# Altium PCB Tassel43_RGB.pcbdoc (part 1 of 2)
Units mil, origin at the board's own origin, x right, y up, seen from the top; angles counter-clockwise.
Board outline 9500.18 x 3500.07 mil, 2 copper layers (Top Layer, Bottom Layer); 91 components, 110 nets, 375 pads, 197 vias.
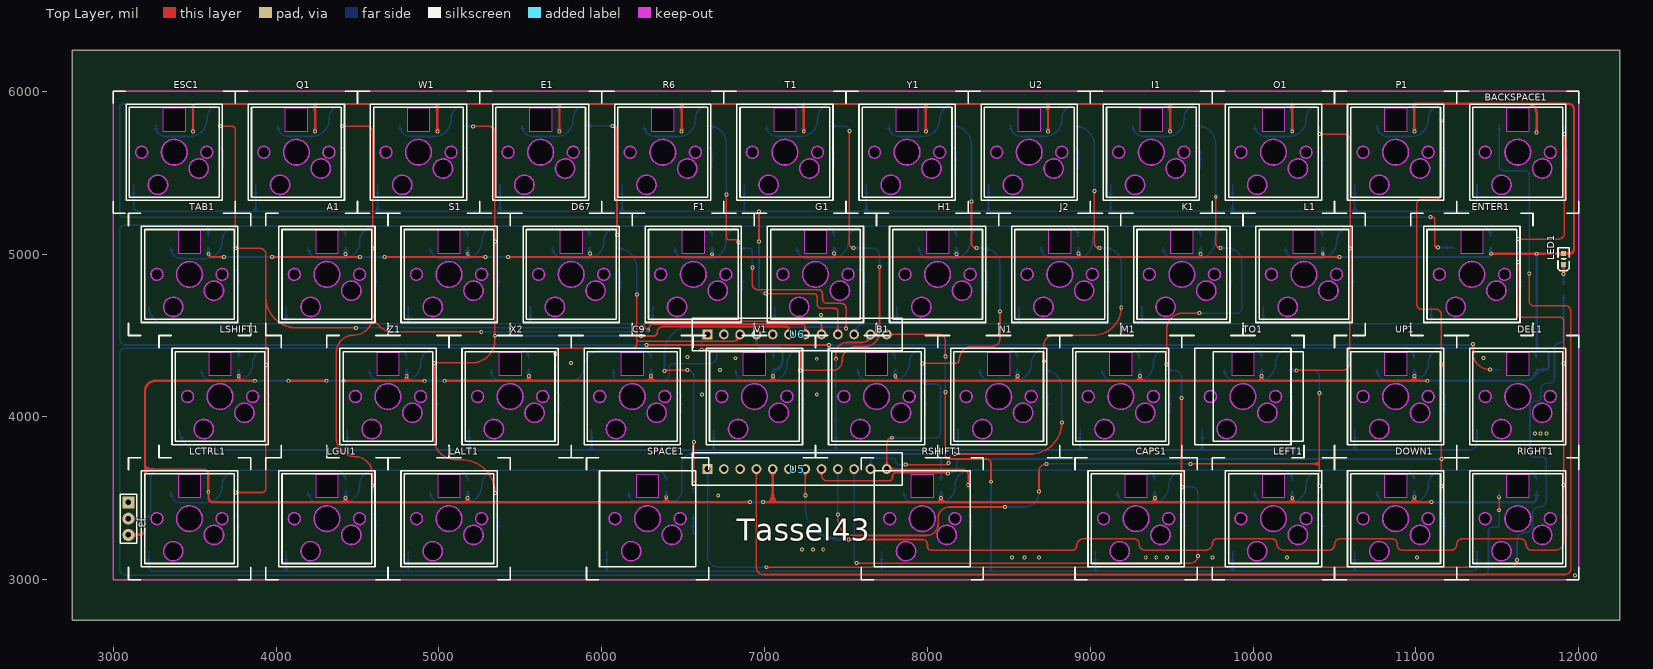
[diagram p0: Top Layer view]
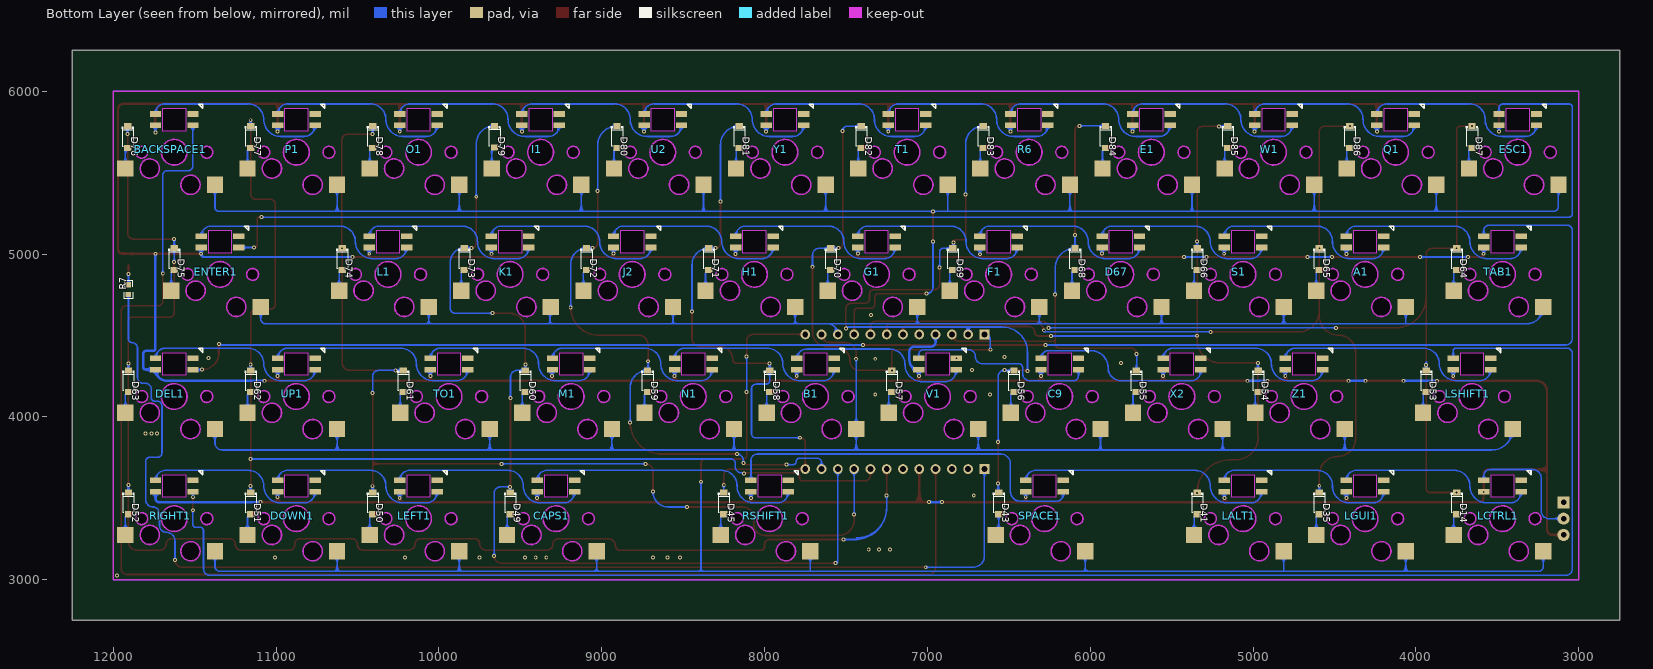
[diagram p1: Bottom Layer view, seen from below]

## Layer stack, top to bottom
Top Layer: signal copper (thickness not stored)
Dielectric: dielectric 12.6, FR-4, Dk 4.8
Bottom Layer: signal copper (thickness not stored)

## Board outline
12250.18,2750 2750,2750 2750,6250.07 12250.18,6250.07

## Components (designator, comment, footprint, x,y, rotation, side; value= is the part's Value field where it differs from the comment)
A1 "凯华轴座+3528反贴灯" 凯华轴座+3528反贴灯 4312.52,4875.05 r0 top
B1 "凯华轴座+3528反贴灯" 凯华轴座+3528反贴灯 7687.59,4125.04 r0 top
BACKSPACE1 "凯华轴座+3528反贴灯" 凯华轴座+3528反贴灯 11625.18,5625.07 r0 top
C9 "凯华轴座+3528反贴灯" 凯华轴座+3528反贴灯 6187.56,4125.04 r0 top
CAPS1 "凯华轴座+3528反贴灯" 凯华轴座+3528反贴灯 9281.38,3375.02 r0 top
D14 "1N4148W" SOD-123_L2.8-W1.8-LS3.7-RD 3750.01,3468.77 r270 bottom
D35 "1N4148W" SOD-123_L2.8-W1.8-LS3.7-RD 4593.78,3468.77 r270 bottom
D41 "1N4148W" SOD-123_L2.8-W1.8-LS3.7-RD 5343.79,3468.77 r270 bottom
D43 "1N4148W" SOD-123_L2.8-W1.8-LS3.7-RD 6562.57,3468.77 r270 bottom
D45 "1N4148W" SOD-123_L2.8-W1.8-LS3.7-RD 8250.1,3468.77 r270 bottom
D49 "1N4148W" SOD-123_L2.8-W1.8-LS3.7-RD 9562.63,3468.77 r270 bottom
D50 "1N4148W" SOD-123_L2.8-W1.8-LS3.7-RD 10406.4,3468.77 r270 bottom
D51 "1N4148W" SOD-123_L2.8-W1.8-LS3.7-RD 11156.42,3468.77 r270 bottom
D52 "1N4148W" SOD-123_L2.8-W1.8-LS3.7-RD 11906.43,3468.77 r270 bottom
D53 "1N4148W" SOD-123_L2.8-W1.8-LS3.7-RD 3937.51,4218.79 r270 bottom
D54 "1N4148W" SOD-123_L2.8-W1.8-LS3.7-RD 4968.78,4218.79 r270 bottom
D55 "1N4148W" SOD-123_L2.8-W1.8-LS3.7-RD 5718.8,4218.79 r270 bottom
D56 "1N4148W" SOD-123_L2.8-W1.8-LS3.7-RD 6468.82,4218.79 r270 bottom
D57 "1N4148W" SOD-123_L2.8-W1.8-LS3.7-RD 7218.83,4218.79 r270 bottom
D58 "1N4148W" SOD-123_L2.8-W1.8-LS3.7-RD 7968.85,4218.79 r270 bottom
D59 "1N4148W" SOD-123_L2.8-W1.8-LS3.7-RD 8718.86,4218.79 r270 bottom
D60 "1N4148W" SOD-123_L2.8-W1.8-LS3.7-RD 9468.88,4218.79 r270 bottom
D61 "1N4148W" SOD-123_L2.8-W1.8-LS3.7-RD 10218.9,4218.79 r270 bottom
D62 "1N4148W" SOD-123_L2.8-W1.8-LS3.7-RD 11156.42,4218.79 r270 bottom
D63 "1N4148W" SOD-123_L2.8-W1.8-LS3.7-RD 11906.43,4218.79 r270 bottom
D64 "1N4148W" SOD-123_L2.8-W1.8-LS3.7-RD 3750.01,4968.81 r270 bottom
D65 "1N4148W" SOD-123_L2.8-W1.8-LS3.7-RD 4593.78,4968.81 r270 bottom
D66 "1N4148W" SOD-123_L2.8-W1.8-LS3.7-RD 5343.79,4968.81 r270 bottom
D67 "凯华轴座+3528反贴灯" 凯华轴座+3528反贴灯 5812.55,4875.05 r0 top
D68 "1N4148W" SOD-123_L2.8-W1.8-LS3.7-RD 6093.81,4968.81 r270 bottom
D69 "1N4148W" SOD-123_L2.8-W1.8-LS3.7-RD 6843.82,4968.81 r270 bottom
D70 "1N4148W" SOD-123_L2.8-W1.8-LS3.7-RD 7593.84,4968.81 r270 bottom
D71 "1N4148W" SOD-123_L2.8-W1.8-LS3.7-RD 8343.86,4968.81 r270 bottom
D72 "1N4148W" SOD-123_L2.8-W1.8-LS3.7-RD 9093.87,4968.81 r270 bottom
D73 "1N4148W" SOD-123_L2.8-W1.8-LS3.7-RD 9843.89,4968.81 r270 bottom
D74 "1N4148W" SOD-123_L2.8-W1.8-LS3.7-RD 10593.9,4968.81 r270 bottom
D75 "1N4148W" SOD-123_L2.8-W1.8-LS3.7-RD 11625.18,4968.81 r270 bottom
D76 "1N4148W" SOD-123_L2.8-W1.8-LS3.7-RD 11911.72,5718.05 r270 bottom
D77 "1N4148W" SOD-123_L2.8-W1.8-LS3.7-RD 11156.42,5718.82 r270 bottom
D78 "1N4148W" SOD-123_L2.8-W1.8-LS3.7-RD 10406.4,5718.82 r270 bottom
D79 "1N4148W" SOD-123_L2.8-W1.8-LS3.7-RD 9658.86,5720.56 r270 bottom
D80 "1N4148W" SOD-123_L2.8-W1.8-LS3.7-RD 8906.37,5718.82 r270 bottom
D81 "1N4148W" SOD-123_L2.8-W1.8-LS3.7-RD 8156.35,5718.82 r270 bottom
D82 "1N4148W" SOD-123_L2.8-W1.8-LS3.7-RD 7406.34,5718.82 r270 bottom
D83 "1N4148W" SOD-123_L2.8-W1.8-LS3.7-RD 6656.32,5718.82 r270 bottom
D84 "1N4148W" SOD-123_L2.8-W1.8-LS3.7-RD 5906.3,5718.82 r270 bottom
D85 "1N4148W" SOD-123_L2.8-W1.8-LS3.7-RD 5156.29,5718.82 r270 bottom
D86 "1N4148W" SOD-123_L2.8-W1.8-LS3.7-RD 4406.27,5718.82 r270 bottom
D87 "1N4148W" SOD-123_L2.8-W1.8-LS3.7-RD 3656.26,5718.82 r270 bottom
DEL1 "凯华轴座+3528反贴灯" 凯华轴座+3528反贴灯 11625.18,4125.04 r0 top
DOWN1 "凯华轴座+3528反贴灯" 凯华轴座+3528反贴灯 10875.16,3375.02 r0 top
E1 "凯华轴座+3528反贴灯" 凯华轴座+3528反贴灯 5625.05,5625.07 r0 top
ENTER1 "凯华轴座+3528反贴灯" 凯华轴座+3528反贴灯 11343.92,4875.05 r0 top
ESC1 "凯华轴座+3528反贴灯" 凯华轴座+3528反贴灯 3375,5625.07 r0 top
F1 "凯华轴座+3528反贴灯" 凯华轴座+3528反贴灯 6562.57,4875.05 r0 top
G1 "凯华轴座+3528反贴灯" 凯华轴座+3528反贴灯 7312.58,4875.05 r0 top
H1 "凯华轴座+3528反贴灯" 凯华轴座+3528反贴灯 8062.6,4875.05 r0 top
I1 "凯华轴座+3528反贴灯" 凯华轴座+3528反贴灯 9375.13,5625.07 r0 top
J2 "凯华轴座+3528反贴灯" 凯华轴座+3528反贴灯 8812.62,4875.05 r0 top
J3 "排针3P" 排针3P 3093.74,3375.02 r270 top
K1 "凯华轴座+3528反贴灯" 凯华轴座+3528反贴灯 9562.63,4875.05 r0 top
L1 "凯华轴座+3528反贴灯" 凯华轴座+3528反贴灯 10312.65,4875.05 r0 top
LALT1 "凯华轴座+3528反贴灯" 凯华轴座+3528反贴灯 5062.54,3375.02 r0 top
LCTRL1 "凯华轴座+3528反贴灯" 凯华轴座+3528反贴灯 3468.75,3375.02 r0 top
LED1 "TJ-S1608SW6TGLC2R-A5" LED0603-R-RD_RED 11906.43,4968.81 r90 top
LEFT1 "凯华轴座+3528反贴灯" 凯华轴座+3528反贴灯 10125.14,3375.02 r0 top
LGUI1 "凯华轴座+3528反贴灯" 凯华轴座+3528反贴灯 4312.52,3375.02 r0 top
LSHIFT1 "凯华轴座+3528反贴灯" 凯华轴座+3528反贴灯 3656.26,4125.04 r0 top
M1 "凯华轴座+3528反贴灯" 凯华轴座+3528反贴灯 9187.62,4125.04 r0 top
N1 "凯华轴座+3528反贴灯" 凯华轴座+3528反贴灯 8437.61,4125.04 r0 top
O1 "凯华轴座+3528反贴灯" 凯华轴座+3528反贴灯 10125.14,5625.07 r0 top
P1 "凯华轴座+3528反贴灯" 凯华轴座+3528反贴灯 10875.16,5625.07 r0 top
Q1 "凯华轴座+3528反贴灯" 凯华轴座+3528反贴灯 4125.02,5625.07 r0 top
R6 "凯华轴座+3528反贴灯" 凯华轴座+3528反贴灯 6375.06,5625.07 r0 top
R7 "1kΩ" R0603 11906.43,4781.3 r90 bottom
RIGHT1 "凯华轴座+3528反贴灯" 凯华轴座+3528反贴灯 11625.18,3375.02 r0 top
RSHIFT1 "凯华轴座+3528反贴灯" 凯华轴座+3528反贴灯 7968.85,3375.02 r0 top
S1 "凯华轴座+3528反贴灯" 凯华轴座+3528反贴灯 5062.54,4875.05 r0 top
SPACE1 "凯华轴座+3528反贴灯" 凯华轴座+3528反贴灯 6281.31,3375.02 r0 top
T1 "凯华轴座+3528反贴灯" 凯华轴座+3528反贴灯 7125.08,5625.07 r0 top
TAB1 "凯华轴座+3528反贴灯" 凯华轴座+3528反贴灯 3468.75,4875.05 r0 top
TO1 "凯华轴座+3528反贴灯" 凯华轴座+3528反贴灯 9937.64,4125.04 r0 top
U2 "凯华轴座+3528反贴灯" 凯华轴座+3528反贴灯 8625.11,5625.07 r0 top
U5 "1X12排针" 1X12排针 6750.07,3579.53 r90 top
U6 "1X12排针" 1X12排针 6750.07,4406.3 r90 top
UP1 "凯华轴座+3528反贴灯" 凯华轴座+3528反贴灯 10875.16,4125.04 r0 top
V1 "凯华轴座+3528反贴灯" 凯华轴座+3528反贴灯 6937.58,4125.04 r0 top
W1 "凯华轴座+3528反贴灯" 凯华轴座+3528反贴灯 4875.03,5625.07 r0 top
X2 "凯华轴座+3528反贴灯" 凯华轴座+3528反贴灯 5437.54,4125.04 r0 top
Y1 "凯华轴座+3528反贴灯" 凯华轴座+3528反贴灯 7875.1,5625.07 r0 top
Z1 "凯华轴座+3528反贴灯" 凯华轴座+3528反贴灯 4687.53,4125.04 r0 top

## Footprints (in the part's own frame and the unit in brackets; to place one, negate y for a bottom-side part, rotate by r counter-clockwise, add the part's x,y. Pads: shape width x height; smd on the part's side, far side on the other; paste and mask are expansions set on the pad)
1X12排针 [mil]
  rect 60x60 hole 36: 1(100,100.01)
  round 60 hole 36 copper offset -0.01,0.01: 2(100.02,-0.01) 3(100.02,-100.01) 4(100.02,-200.01) 5(100.02,-300.01) 6(100.02,-400.01) 7(100.02,-500.01) 8(100.02,-600.01) 9(100.02,-700.01) 10(100.02,-800.01) 11(100.02,-900.01) 12(100.02,-1000.01)
  silkscreen extent 0,-1095 200,195
LED0603-R-RD_RED [mm]
  rect 0.8x0.8 smd: 1(0.851,0) 2(-0.851,0)
  silkscreen extent -1.82,-0.86 1.77,0.86
R0603 [mil]
  rect 31.75x34.02 smd: 1(-29.66,0) 2(29.65,0)
  silkscreen extent -55,-26 55,26
SOD-123_L2.8-W1.8-LS3.7-RD [mm]
  rect 0.95x1.15 smd: 1(-1.692,0) 2(1.692,0)
  silkscreen extent -1.63,-0.94 1.41,0.94
凯华轴座+3528反贴灯 [mil]
  rect 70x35 smd far side: 1(115,165) 2(115,235) 5(-115,235) 6(-115,165)
  rect 100x100 smd far side: 3(-250,-200) 4(300,-100)
  Multi-Layer board cut-out: 70,270 -70,270 -70,130 70,130
  Multi-Layer board cut-out: 78.74,0 70.94,34.16 49.09,61.56 17.52,76.77 -17.52,76.76 -49.09,61.56 -70.94,34.16 -78.74,0 -78.74,0 -68.19,-39.37 -39.37,-68.19 0,-78.74 39.37,-68.19 68.19,-39.37 78.74,0
  Multi-Layer board cut-out: 236.42,0 231.4,18.03 218.09,31.18 200,35.99 181.92,31.18 168.61,18.02 163.59,0 163.59,0 168.61,-18.03 181.92,-31.18 200.01,-35.99 218.09,-31.18 231.4,-18.03 236.42,0
  Multi-Layer board cut-out: -163.58,0 -168.6,18.03 -181.91,31.18 -200,35.99 -218.08,31.18 -231.39,18.02 -236.41,0 -236.41,0 -231.39,-18.03 -218.08,-31.18 -199.99,-35.99 -181.91,-31.18 -168.6,-18.03 -163.58,0
  Multi-Layer board cut-out: -40.94,-200 -49,-170.65 -70.59,-149.21 -100,-141.37 -129.4,-149.21 -151,-170.65 -159.05,-200 -159.05,-200 -151,-229.35 -129.4,-250.79 -99.99,-258.64 -70.59,-250.79 -48.99,-229.35 -40.94,-200
  Multi-Layer board cut-out: 209.06,-100 201,-70.65 179.41,-49.21 150,-41.37 120.6,-49.21 99,-70.65 90.95,-100 90.95,-100 99,-129.35 120.6,-150.79 150.01,-158.64 179.41,-150.79 201.01,-129.35 209.06,-100
  silkscreen extent -375,-375 375,375
排针3P [mil]
  rect 74x74 hole 34: 1(-100,0)
  round 74 hole 34: 2(0,0) 3(100,0)
  silkscreen extent -150,-50 150,50

## Via types
v1: diameter 24, hole 12, Top Layer to Bottom Layer, 197 vias

## Nets (pads, with @x,y where several pads share a name; then routed paths per layer and width w, separated by ;. In a path a pad name is that pad's centre, name@x,y a point inside that pad or via, vN(x,y) a via of type N, cw(c..) or ccw(c..) an arc to the next point about the centre after c; other vN are vias at no path point)
A1_4: A1.4 D65.2 | length 137.8
  Bottom Layer w10: D65.2@4593.78,4902.18 cw(c4593.78,4883.43) 4612.52,4883.43 A1.4@4612.52,4775.05
A1_6: A1.6 S1.2 | length 1168.4
  Bottom Layer w10: A1.6@4197.52,5040.05 ccw(c4265.88,5040.05) 4265.88,4971.69 4407.89,4971.69 ccw(c4407.89,5076.69) 4512.89,5076.69 cw(c4607.89,5076.69) 4607.89,5171.69 5115.9,5171.69 cw(c5115.9,5110.05) S1.2@5177.54,5110.05
B1_4: B1.4 D58.2 | length 137.8
  Bottom Layer w10: D58.2@7968.85,4152.16 cw(c7968.85,4133.42) 7987.59,4133.42 B1.4@7987.59,4025.04
B1_6: B1.6 N1.2 | length 1168.4
  Bottom Layer w10: B1.6@7572.59,4290.04 ccw(c7640.96,4290.04) 7640.96,4221.68 7782.96,4221.68 ccw(c7782.96,4326.68) 7887.96,4326.68 cw(c7982.96,4326.68) 7982.96,4421.68 8490.97,4421.68 cw(c8490.97,4360.04) N1.2@8552.61,4360.04
BACKSPACE1_2: BACKSPACE1.2 P1.6 | length 1171.8
  Bottom Layer w10: P1.6@10760.16,5790.07 ccw(c10828.52,5790.07) 10828.52,5721.71 10970.53,5721.71 ccw(c10970.53,5826.71) 11075.53,5826.71 cw(c11170.53,5826.71) 11170.53,5921.71 11686.44,5921.71 cw(c11686.44,5867.97) 11740.18,5867.97 BACKSPACE1.2@11740.18,5860.07
C9_4: C9.4 D56.2 | length 137.8
  Bottom Layer w10: D56.2@6468.82,4152.16 cw(c6468.82,4133.42) 6487.56,4133.42 C9.4@6487.56,4025.04
C9_6: C9.6 V1.2 | length 1200.8
  Bottom Layer w10: C9.6@6072.56,4290.04 6072.56,4252.65 ccw(c6103.5,4252.65) 6103.5,4221.71 6370.53,4221.71 ccw(c6370.53,4266.71) 6415.53,4266.71 6415.53,4302.68 cw(c6439.56,4302.68) 6439.56,4326.71 6663.17,4326.71 ccw(c6663.17,4369.06) 6705.53,4369.06 6705.53,4371.71 cw(c6745.53,4371.71) 6745.53,4411.71 7027.01,4411.71 cw(c7027.01,4386.14) 7052.58,4386.14 V1.2@7052.58,4360.04
CAPLED: R7.1 U5.1 | length 7507.9
  Top Layer w10: v1(7010.53,3076.71) 11575.53,3076.71 ccw(c11575.53,3121.71) v1(11620.53,3121.71)
  Bottom Layer w10: U5.1@6650.07,3679.53 6650.07,3146.09 ccw(c6719.46,3146.09) 6719.46,3076.71 v1(7010.53,3076.71) ; v1(11620.53,3121.71) 11620.53,3236.71 cw(c11675.53,3236.71) 11675.53,3291.71 ccw(c11675.53,3331.71) 11715.53,3331.71 11715.53,3406.71 cw(c11755.53,3406.71) 11755.53,3446.71 ccw(c11755.53,3491.71) 11800.53,3491.71 11800.53,3726.96 ccw(c11775.53,3726.96) 11775.53,3751.96 11727.85,3751.96 cw(c11727.85,3779.28) 11700.53,3779.28 11700.53,4066.71 cw(c11730.53,4066.71) 11730.53,4096.71 11746.05,4096.71 ccw(c11746.05,4116.19) 11765.53,4116.19 11765.53,4166.71 cw(c11805.53,4166.71) 11805.53,4206.71 11815.53,4206.71 ccw(c11815.53,4241.71) 11850.53,4241.71 11850.53,4421.71 cw(c11885.53,4421.71) 11885.53,4456.71 ccw(c11885.53,4477.61) 11906.43,4477.61 R7.1@11906.43,4751.64
CAPS1_4: CAPS1.4 D49.2 | length 137.8
  Bottom Layer w10: D49.2@9562.64,3402.14 cw(c9562.64,3383.4) 9581.38,3383.4 CAPS1.4@9581.38,3275.02
CAPS1_6: CAPS1.6 LEFT1.2 | length 1262.1
  Bottom Layer w10: CAPS1.6@9166.38,3540.02 ccw(c9234.74,3540.02) 9234.74,3471.66 9376.75,3471.66 ccw(c9376.75,3576.66) 9481.75,3576.66 cw(c9576.75,3576.66) 9576.75,3671.66 10178.51,3671.66 cw(c10178.51,3610.02) LEFT1.2@10240.15,3610.02
COL0: D14.1 D53.1 D64.1 D87.1 U6.8 | length 6344.9
  Top Layer w10: v1(3656.26,5785.45) 3726.9,5785.45 cw(c3726.9,5762.34) 3750.01,5762.34 v1(3750.01,5035.44) 3899.22,5035.44 cw(c3899.22,4997.14) 3937.52,4997.14 3937.52,4735.5 ; v1(3750.01,3535.4) 3912.44,3535.4 ccw(c3912.44,3560.48) 3937.52,3560.48 v1(3937.52,4317.62) 3937.52,4735.5 ; v1(4490.53,4546.71) 4126.31,4546.71 cw(c4126.31,4735.5) 3937.52,4735.5 ; v1(6255.53,4546.71) cw(c6295.53,4546.71) 6295.53,4586.71 7320.39,4586.71 cw(c7320.39,4557.01) 7350.08,4557.01 U6.8@7350.09,4506.32
  Bottom Layer w10: 3935.53,4336.71 cw(c3935.53,4334.72) 3937.52,4334.72 v1(3937.52,4317.62) D53.1@3937.52,4285.42 ; v1(4490.53,4546.71) v1(6255.53,4546.71)
  other v1: 4490.53,4546.71
COL1: D35.1 D65.1 D86.1 U6.7 | length 5490.8
  Top Layer w10: v1(4406.28,5785.45) 4557.65,5785.45 cw(c4557.65,5749.32) 4593.78,5749.32 v1(4593.78,5035.44) 4593.78,4650.06 ; v1(4593.78,3577.18) 4593.78,3643.46 ccw(c4480.53,3643.46) 4480.53,3756.71 cw(c4480.53,3866.71) 4370.53,3866.71 4370.53,4396.71 cw(c4475.53,4396.71) 4475.53,4501.71 ccw(c4475.53,4619.96) 4593.78,4619.96 4593.78,4650.06 ; v1(5260.53,4521.71) 4722.14,4521.71 cw(c4722.14,4650.06) 4593.78,4650.06 ; v1(6285.53,4531.71) cw(c6325.53,4531.71) 6316.64,4570.71 7230.13,4570.71 cw(c7230.13,4550.75) 7250.08,4550.75 U6.7@7250.09,4506.32
  Bottom Layer w10: D35.1@4593.78,3535.4 v1(4593.78,3577.18) ; v1(5260.53,4521.71) 6275.53,4521.71 ccw(c6275.53,4531.71) v1(6285.53,4531.71)
COL2: D41.1 D54.1 D66.1 D85.1 U6.6 | length 4941
  Top Layer w10: v1(5209.85,5783.82) 5310.36,5783.82 cw(c5310.36,5750.39) 5343.8,5750.39 v1(5343.8,5078.08) v1(5343.8,4498.09) 5343.8,4471.43 cw(c5204.07,4471.43) 5204.07,4331.71 v1(4970.53,4331.71) 4970.53,3875.2 4968.78,3873.45 ccw(c5105.53,3873.45) 5105.53,3736.71 5140.86,3736.71 cw(c5140.86,3533.77) v1(5343.79,3533.77) ; v1(6240.53,4496.71) 6320.53,4496.71 6321.91,4498.09 ccw(c6321.91,4516.71) 6340.53,4516.71 cw(c6378.53,4516.71) 6378.53,4554.71 7140.4,4554.71 cw(c7140.4,4545.02) 7150.08,4545.02 U6.6@7150.09,4506.32
  Bottom Layer w10: D54.1@4968.79,4285.42 4970.53,4287.16 v1(4970.53,4331.71) ; D85.1@5156.29,5785.45 ccw(c5157.92,5785.45) 5157.92,5783.82 v1(5209.85,5783.82) ; v1(5343.8,4498.09) 5345.17,4496.71 v1(6240.53,4496.71) ; D66.1@5343.8,5035.44 v1(5343.8,5078.08)
COL3: D55.1 D68.1 D84.1 U6.3 | length 2884.5
  Top Layer w10: v1(5715.53,4386.71) cw(c5750.53,4386.71) 5750.53,4421.71 6190.53,4421.71 ccw(c6190.53,4446.71) 6215.53,4446.71 6215.53,4472.63 ; v1(6065.53,5786.71) cw(c6065.53,5758.42) 6093.81,5758.42 v1(6093.81,5116.71) ; v1(6215.53,4751.71) 6215.53,4472.63 ; U6.3@6850.09,4506.32 cw(c6808.48,4506.31) 6808.48,4464.71 6223.45,4464.71 6215.53,4472.63
  Bottom Layer w10: v1(5715.53,4386.71) 5715.53,4288.69 ccw(c5718.8,4288.69) D55.1@5718.8,4285.42 ; D84.1@5906.31,5785.45 cw(c5907.56,5785.45) 5907.56,5786.71 v1(6065.53,5786.71) ; v1(6093.81,5116.71) D68.1@6093.81,5035.44 cw(c6093.81,4913.72) 6215.53,4913.72 v1(6215.53,4751.71)
COL4: D43.1 D56.1 D69.1 D83.1 U6.2 | length 4314.7
  Top Layer w10: v1(6385.53,4281.71) 6385.53,4286.71 v1(6525.53,4286.71) ; v1(6565.53,3591.71) v1(6565.53,3846.71) ; v1(6765.53,5366.71) 6765.53,5104.01 ccw(c6782.83,5104.01) 6782.83,5086.71 6825.53,5086.71 cw(c6825.53,5071.71) v1(6840.53,5071.71) ; v1(6925.53,4916.71) 6925.53,4811.23 ccw(c6955.05,4811.23) 6955.05,4781.71 7330.53,4781.71 cw(c7330.53,4756.71) 7355.53,4756.71 7355.53,4726.71 ccw(c7385.53,4726.71) 7385.53,4696.71 7470.77,4696.71 cw(c7470.77,4666.95) 7500.53,4666.95 v1(7500.53,4542.97)
  Bottom Layer w10: v1(6385.53,4281.71) 6385.53,4396.71 cw(c6540.53,4396.71) 6540.53,4551.71 6751.03,4551.71 ; D56.1@6468.82,4285.42 6524.24,4285.42 ccw(c6524.24,4286.71) v1(6525.53,4286.71) cw(c6525.53,4246.71) 6565.53,4246.71 v1(6565.53,3846.71) ; D43.1@6562.57,3535.4 cw(c6562.57,3537.45) 6560.53,3537.45 6565.53,3542.45 v1(6565.53,3591.71) ; D83.1@6656.32,5785.45 cw(c6656.32,5676.25) 6765.53,5676.25 v1(6765.53,5366.71) ; U6.2@6750.09,4506.32 6750.08,4550.76 cw(c6751.03,4550.76) 6751.03,4551.71 ; v1(6840.53,5071.71) 6840.53,5038.73 ccw(c6843.83,5038.73) D69.1@6843.83,5035.44 6902.16,5035.44 cw(c6902.16,5012.07) 6925.53,5012.07 v1(6925.53,4916.71) ; v1(7500.53,4542.97) ccw(c7491.8,4542.97) 7491.8,4551.71 6751.03,4551.71
  other v1: 7500.53,4542.97
COL5: D57.1 D70.1 D82.1 U6.1 | length 2980.2
  Top Layer w10: v1(6613.79,4412.42) 7196.59,4412.42 cw(c7196.59,4390.18) 7218.84,4390.18 v1(7218.84,4285.42) 7419.24,4285.42 ccw(c7419.24,4341.71) 7475.53,4341.71 cw(c7565.53,4341.71) 7565.53,4431.71 7615.53,4431.71 ccw(c7615.53,4521.71) 7705.53,4521.71 v1(7705.53,4921.71) ; v1(7520.53,5756.71) 7520.53,5061.71 ccw(c7545.53,5061.71) v1(7545.53,5036.71)
  Bottom Layer w10: v1(6613.79,4412.42) 6613.79,4470.02 cw(c6650.07,4470.02) U6.1@6650.07,4506.3 ; D82.1@7406.34,5785.45 7491.78,5785.45 cw(c7491.78,5756.71) v1(7520.53,5756.71) ; v1(7545.53,5036.71) 7592.57,5036.71 cw(c7592.57,5035.44) D70.1@7593.84,5035.44 7664.08,5035.44 cw(c7664.08,4993.99) 7705.53,4993.99 v1(7705.53,4921.71)
  other v1: 7218.84,4285.42 6613.79,4412.42
COL6: D45.1 D58.1 D71.1 D81.1 U5.12 | length 3704.9
  Top Layer w10: v1(7781.98,3871.71) ccw(c7781.98,3839.8) 7750.08,3839.8 7750.08,3684.54 U5.12@7750.09,3679.55 8211.96,3679.54 cw(c8211.96,3640.97) 8250.53,3640.97 v1(8250.53,3581.71) ; v1(7968.85,4328.79) 8172.61,4328.79 ccw(c8172.61,4351.71) 8195.53,4351.71 cw(c8275.53,4351.71) 8275.53,4431.71 8395.53,4431.71 ccw(c8395.53,4481.71) 8445.53,4481.71 v1(8445.53,4646.71) ; v1(8270.53,5321.71) 8270.53,5066.71 ccw(c8300.53,5066.71) v1(8300.53,5036.71)
  Bottom Layer w10: v1(7781.98,3871.71) 8055.53,3871.71 ccw(c8055.53,3896.71) 8080.53,3896.71 8080.53,4171.71 ccw(c8050.53,4171.71) 8050.53,4201.71 7988.9,4201.71 cw(c7988.9,4221.75) 7968.85,4221.75 D58.1@7968.85,4285.42 v1@7968.85,4328.78 ; D81.1@8156.36,5785.45 cw(c8156.36,5671.28) 8270.53,5671.28 v1(8270.53,5321.71) ; 8250.11,3555.04 8250.53,3555.46 v1(8250.53,3581.71) ; v1(8300.53,5036.71) 8342.59,5036.71 cw(c8342.59,5035.44) D71.1@8343.86,5035.44 cw(c8343.86,4933.77) 8445.53,4933.77 v1(8445.53,4646.71)
  other v1: 8250.53,3581.71
COL7: D59.1 D72.1 D80.1 U5.11 | length 3844.2
  Top Layer w10: v1(7865.53,3706.71) 8120.53,3706.71 ccw(c8120.53,3716.71) v1(8130.53,3716.71) ; v1(8170.53,3771.71) 8630.53,3771.71 ccw(c8630.53,3966.71) v1(8825.53,3966.71) ; v1(8715.53,4341.71) 8715.53,4441.71 cw(c8775.53,4441.71) 8775.53,4501.71 9020.53,4501.71 ccw(c9020.53,4671.71) v1(9190.53,4671.71) ; v1(9025.53,5386.71) 9025.53,5066.71 ccw(c9055.53,5066.71) v1(9055.53,5036.71)
  Bottom Layer w10: U5.11@7650.09,3679.55 7650.08,3718.8 cw(c7677.99,3718.8) 7677.99,3746.71 7785.53,3746.71 cw(c7785.53,3726.71) 7805.53,3726.71 ccw(c7825.53,3726.71) 7825.53,3706.71 v1(7865.53,3706.71) ; v1(8130.53,3716.71) 8130.53,3731.71 cw(c8170.53,3731.71) v1(8170.53,3771.71) ; v1(8715.53,4341.71) 8715.53,4288.76 ccw(c8718.87,4288.76) D59.1@8718.87,4285.42 cw(c8718.87,4178.76) 8825.53,4178.76 v1(8825.53,3966.71) ; D80.1@8906.37,5785.45 cw(c8906.37,5666.29) 9025.53,5666.29 v1(9025.53,5386.71) ; v1(9055.53,5036.71) 9092.6,5036.71 cw(c9092.6,5035.44) D72.1@9093.88,5035.44 cw(c9093.88,4938.78) 9190.53,4938.78 v1(9190.53,4671.71)
COL8: D49.1 D60.1 D73.1 D79.1 U5.10 | length 6114.2
  Top Layer w10: v1(7565.53,3101.71) 9615.53,3101.71 ccw(c9615.53,3146.71) v1(9660.53,3146.71) ; v1(9468.88,4320.72) 9468.88,4536.25 cw(c9569.34,4536.25) 9569.34,4636.71 v1(9670.53,4636.71) ; v1@9560.53,3572.63 v1(9560.53,4116.71) ; v1(9770.53,5351.71) 9770.53,5066.71 ccw(c9800.53,5066.71) v1(9800.53,5036.71)
  Bottom Layer w10: U5.10@7550.09,3679.55 7550.08,3117.16 ccw(c7565.53,3117.16) v1(7565.53,3101.71) ; v1(9468.88,4320.72) D60.1@9468.88,4285.42 9519.68,4285.42 cw(c9519.68,4244.57) 9560.53,4244.57 v1(9560.53,4116.71) ; D49.1@9562.64,3535.4 ccw(c9562.64,3535.75) 9562.98,3535.75 v1(9562.98,3570.18) 9621.91,3570.18 cw(c9621.91,3531.56) 9660.53,3531.56 v1(9660.53,3146.71) ; D79.1@9658.87,5787.19 cw(c9658.87,5675.53) 9770.53,5675.53 v1(9770.53,5351.71) ; v1(9670.53,4636.71) 9900.53,4636.71 ccw(c9900.53,4666.71) 9930.53,4666.71 9930.53,4948.8 ccw(c9843.89,4948.8) D73.1@9843.89,5035.44 ccw(c9842.62,5035.44) 9842.62,5036.71 v1(9800.53,5036.71)
  other v1: 9562.98,3570.18 9560.53,4116.71 9468.88,4320.72 9670.53,4636.71
COL9: D50.1 D61.1 D74.1 D78.1 U5.9 | length 6549.1
  Top Layer w10: v1(7450.53,3401.71) 7450.53,3366.71 ccw(c7545.53,3366.71) 7545.53,3271.71 7995.53,3271.71 ccw(c7995.53,3341.71) 8065.53,3341.71 8065.53,3376.71 cw(c8135.53,3376.71) 8135.53,3446.71 v1(8475.53,3446.71) ; v1(8685.53,3541.71) 8685.53,3666.71 cw(c8730.53,3666.71) v1(8730.53,3711.71) ; v1(9615.53,3711.71) 10406.75,3711.71 ; v1(10265.16,4285.42) 10547.35,4285.42 ccw(c10547.35,4331.97) 10593.91,4331.97 v1(10593.91,5035.44) ccw(c10593.91,5037.06) 10595.53,5037.06 10595.53,5700.79 ccw(c10560.28,5700.79) 10560.28,5736.04 v1(10406.75,5736.04) ; v1(10406.75,3574.21) 10406.75,3711.71 ; v1(10406.75,4146.71) 10406.75,3711.71
  Bottom Layer w10: U5.9@7450.09,3679.55 cw(c7450.08,3679.09) 7450.53,3679.09 v1(7450.53,3401.71) ; v1(8475.53,3446.71) 8590.53,3446.71 ccw(c8590.53,3541.71) v1(8685.53,3541.71) ; v1(8730.53,3711.71) v1(9615.53,3711.71) ; D61.1@10218.9,4285.42 v1(10265.16,4285.42) 10369.82,4285.42 cw(c10369.82,4248.49) 10406.75,4248.49 v1(10406.75,4146.71) ; D50.1@10406.4,3535.4 ccw(c10406.4,3535.75) 10406.75,3535.75 v1(10406.75,3574.21) ; D78.1@10406.4,5785.45 10406.4,5736.38 ccw(c10406.75,5736.38) v1(10406.75,5736.04)
  other v1: 10406.75,3574.21
COL10: D51.1 D62.1 D77.1 U5.8 | length 6567.3
  Top Layer w10: U5.8@7350.09,3679.55 7350.08,3642.16 ccw(c7385.53,3642.16) 7385.53,3606.71 7765.53,3606.71 ccw(c7765.53,3626.71) 7785.53,3626.71 7785.53,3636.71 cw(c7805.53,3636.71) 7805.53,3656.71 8120.53,3656.71 cw(c8120.53,3651.71) v1(8125.53,3651.71) ; v1(11155.53,5821.71) 11155.53,5367.73 cw(c11124.51,5367.73) 11124.51,5336.71 11035.77,5336.71 ccw(c11035.77,5306.47) 11005.53,5306.47 11005.53,4688.94 ccw(c11032.76,4688.94) 11032.76,4661.71 11121.34,4661.71 cw(c11121.34,4627.52) 11155.53,4627.52 v1(11155.53,4321.71) cw(c11155.53,4320.82) 11156.42,4320.82 v1(11156.42,3741.71) v1(11156.42,3574.33)
  Bottom Layer w10: v1(8125.53,3651.71) cw(c8130.53,3651.71) 8130.53,3656.71 8140.53,3656.71 ccw(c8140.53,3696.71) 8180.53,3696.71 8180.53,3716.71 cw(c8205.53,3716.71) 8205.53,3741.71 v1(11156.42,3741.71) ; v1(11155.53,4321.71) cw(c11155.53,4320.82) 11156.42,4320.82 D62.1@11156.42,4285.42 ; v1(11155.53,5821.71) cw(c11155.53,5820.82) 11156.42,5820.82 D77.1@11156.42,5785.45 ; D51.1@11156.42,3535.4 v1(11156.42,3574.33)
COL11: D52.1 D63.1 D75.1 D76.1 U5.7 | length 8865
  Top Layer w10: U5.7@7250.09,3679.55 7250.08,3517.16 ccw(c7250.53,3517.16) v1(7250.53,3516.71) ; v1(7515.53,3246.71) 7970.53,3246.71 cw(c7970.53,3216.71) 8000.53,3216.71 8000.53,3201.71 ccw(c8020.53,3201.71) 8020.53,3181.71 8890.53,3181.71 ccw(c8890.53,3206.71) 8915.53,3206.71 cw(c8960.53,3206.71) 8960.53,3251.71 9265.53,3251.71 cw(c9265.53,3216.71) 9300.53,3216.71 ccw(c9335.53,3216.71) 9335.53,3181.71 9710.53,3181.71 ccw(c9710.53,3221.71) 9750.53,3221.71 cw(c9780.53,3221.71) 9780.53,3251.71 10115.53,3251.71 cw(c10115.53,3221.71) 10145.53,3221.71 ccw(c10185.53,3221.71) 10185.53,3181.71 10465.53,3181.71 ccw(c10465.53,3216.71) 10500.53,3216.71 cw(c10535.53,3216.71) 10535.53,3251.71 10850.53,3251.71 cw(c10850.53,3216.71) 10885.53,3216.71 10885.53,3211.71 ccw(c10915.53,3211.71) 10915.53,3181.71 11215.53,3181.71 ccw(c11215.53,3216.71) 11250.53,3216.71 cw(c11285.53,3216.71) 11285.53,3251.71 11640.53,3251.71 cw(c11640.53,3216.71) 11675.53,3216.71 ccw(c11710.53,3216.71) 11710.53,3181.71 11856.6,3181.71 ccw(c11856.6,3231.89) 11906.78,3231.89 v1(11906.78,3581.71) v1(11906.78,4328.49) 11906.78,4592.05 ccw(c11887.13,4592.05) 11887.13,4611.71 11651.96,4611.71 cw(c11651.96,4638.14) 11625.53,4638.14 v1(11625.53,4951.71) ; v1(11625.53,5091.71) 11874.93,5091.71 ccw(c11874.93,5128.5) 11911.72,5128.5 v1(11911.72,5736.32)
  Bottom Layer w10: v1(7250.53,3516.71) 7250.53,3441.71 ; 7435.53,3256.71 cw(c7435.53,3441.71) 7250.53,3441.71 ; v1(7515.53,3246.71) 7445.53,3246.71 cw(c7445.53,3441.71) 7250.53,3441.71 ; v1(11625.53,4951.71) 11625.53,5035.09 ccw(c11625.18,5035.09) D75.1@11625.18,5035.44 11625.18,5091.36 cw(c11625.53,5091.36) v1(11625.53,5091.71) ; D52.1@11906.44,3535.4 ccw(c11906.44,3535.75) 11906.78,3535.75 v1(11906.78,3581.71) ; D63.1@11906.44,4285.42 11906.44,4328.15 cw(c11906.78,4328.15) v1(11906.78,4328.49) ; v1(11911.72,5736.32) D76.1@11911.73,5784.68
D14_2: D14.2 LCTRL1.4 | length 137.8
  Bottom Layer w10: D14.2@3750.01,3402.14 cw(c3750.01,3383.4) 3768.75,3383.4 LCTRL1.4@3768.75,3275.02
D53_2: D53.2 LSHIFT1.4 | length 137.8
  Bottom Layer w10: D53.2@3937.52,4152.16 cw(c3937.52,4133.42) 3956.26,4133.42 LSHIFT1.4@3956.26,4025.04
D64_2: D64.2 TAB1.4 | length 137.8
  Bottom Layer w10: D64.2@3750.01,4902.18 cw(c3750.01,4883.43) 3768.75,4883.43 TAB1.4@3768.75,4775.05
D67_4: D67.4 D68.2 | length 137.8
  Bottom Layer w10: D68.2@6093.81,4902.18 cw(c6093.81,4883.43) 6112.55,4883.43 D67.4@6112.55,4775.05
D67_6: D67.6 F1.2 | length 1168.4
  Bottom Layer w10: D67.6@5697.55,5040.05 ccw(c5765.92,5040.05) 5765.92,4971.69 5907.92,4971.69 ccw(c5907.92,5076.69) 6012.92,5076.69 cw(c6107.92,5076.69) 6107.92,5171.69 6615.93,5171.69 cw(c6615.93,5110.05) F1.2@6677.57,5110.05
D76_2: BACKSPACE1.4 D76.2 | length 134
  Bottom Layer w10: D76.2@11911.73,5651.42 cw(c11911.73,5637.97) 11925.18,5637.97 BACKSPACE1.4@11925.18,5525.07
D77_2: D77.2 P1.4 | length 137.8
  Bottom Layer w10: D77.2@11156.42,5652.19 cw(c11156.42,5633.45) 11175.16,5633.45 P1.4@11175.16,5525.07
D78_2: D78.2 O1.4 | length 137.8
  Bottom Layer w10: D78.2@10406.4,5652.19 cw(c10406.4,5633.45) 10425.15,5633.45 O1.4@10425.15,5525.07
D79_2: D79.2 I1.4 | length 138.1
  Bottom Layer w10: D79.2@9658.87,5653.93 cw(c9658.87,5637.67) 9675.13,5637.67 I1.4@9675.13,5525.07
D80_2: D80.2 U2.4 | length 137.8
  Bottom Layer w10: D80.2@8906.37,5652.19 cw(c8906.37,5633.45) 8925.11,5633.45 U2.4@8925.11,5525.07
D81_2: D81.2 Y1.4 | length 137.8
  Bottom Layer w10: D81.2@8156.36,5652.19 cw(c8156.36,5633.45) 8175.1,5633.45 Y1.4@8175.1,5525.07
D82_2: D82.2 T1.4 | length 137.8
  Bottom Layer w10: D82.2@7406.34,5652.19 cw(c7406.34,5633.45) 7425.08,5633.45 T1.4@7425.08,5525.07
D83_2: D83.2 R6.4 | length 137.8
  Bottom Layer w10: D83.2@6656.32,5652.19 cw(c6656.32,5633.45) 6675.07,5633.45 R6.4@6675.07,5525.07
D84_2: D84.2 E1.4 | length 137.8
  Bottom Layer w10: D84.2@5906.31,5652.19 cw(c5906.31,5633.45) 5925.05,5633.45 E1.4@5925.05,5525.07
D85_2: D85.2 W1.4 | length 137.8
  Bottom Layer w10: D85.2@5156.29,5652.19 cw(c5156.29,5633.45) 5175.03,5633.45 W1.4@5175.03,5525.07
D86_2: D86.2 Q1.4 | length 137.8
  Bottom Layer w10: D86.2@4406.28,5652.19 cw(c4406.28,5633.45) 4425.02,5633.45 Q1.4@4425.02,5525.07
D+: U5.3
D-: U5.2
DEL1_4: D63.2 DEL1.4 | length 137.8
  Bottom Layer w10: D63.2@11906.44,4152.16 cw(c11906.44,4133.42) 11925.18,4133.42 DEL1.4@11925.18,4025.04
DEL1_6: DEL1.6 TAB1.2 | length 9892
  Top Layer w10: v1(6275.53,4441.71) v1(7395.53,4441.71) ; 11350.53,4393.67 ccw(c11454.16,4393.67) v1(11454.16,4290.04)
  Top Layer w15: 11350.53,4386.71 11350.53,4393.67 v1(11350.53,4446.71)
  Bottom Layer w10: TAB1.2@3583.75,5110.05 3583.75,5143.48 ccw(c3550.53,5143.48) 3550.53,5176.71 3070.53,5176.71 ccw(c3070.53,5146.71) 3040.53,5146.71 3040.53,4480.36 ccw(c3079.18,4480.36) 3079.18,4441.71 v1(6275.53,4441.71) ; v1(7395.53,4441.71) 11345.53,4441.71 v1(11350.53,4446.71) ; v1(11454.16,4290.04) DEL1.6@11510.18,4290.04
DOWN1_4: D51.2 DOWN1.4 | length 137.8
  Bottom Layer w10: D51.2@11156.42,3402.14 cw(c11156.42,3383.4) 11175.16,3383.4 DOWN1.4@11175.16,3275.02
DOWN1_6: DOWN1.6 RIGHT1.2 | length 1168.4
  Bottom Layer w10: DOWN1.6@10760.16,3540.02 ccw(c10828.52,3540.02) 10828.52,3471.66 10970.53,3471.66 ccw(c10970.53,3576.66) 11075.53,3576.66 cw(c11170.53,3576.66) 11170.53,3671.66 11678.54,3671.66 cw(c11678.54,3610.02) RIGHT1.2@11740.18,3610.02
E1_2: E1.2 W1.6 | length 1168.4
  Bottom Layer w10: W1.6@4760.03,5790.07 ccw(c4828.4,5790.07) 4828.4,5721.71 4970.4,5721.71 ccw(c4970.4,5826.71) 5075.4,5826.71 cw(c5170.4,5826.71) 5170.4,5921.71 5678.41,5921.71 cw(c5678.41,5860.07) E1.2@5740.05,5860.07
ENTER1_4: D75.2 ENTER1.4 | length 137.8
  Bottom Layer w10: D75.2@11625.18,4902.18 cw(c11625.18,4883.43) 11643.92,4883.43 ENTER1.4@11643.92,4775.05
ENTER1_6: ENTER1.6 ESC1.2 | length 9542
  Top Layer w10: v1(11090.53,5226.71) 11103.5,5226.71 cw(c11103.5,5214.68) 11115.53,5214.68 11115.53,5054.82 ccw(c11130.29,5054.82) 11130.29,5040.05 v1(11135.63,5040.05)
  Bottom Layer w10: ESC1.2@3490,5860.07 3490,5897.23 ccw(c3465.53,5897.23) 3465.53,5921.71 3060.53,5921.71 ccw(c3060.53,5901.71) 3040.53,5901.71 3040.53,5246.71 ccw(c3060.53,5246.71) 3060.53,5226.71 v1(11090.53,5226.71) ; v1(11135.63,5040.05) ENTER1.6@11228.92,5040.05
ESC1_4: D87.2 ESC1.4 | length 137.8
  Bottom Layer w10: D87.2@3656.26,5652.19 cw(c3656.26,5633.45) 3675,5633.45 ESC1.4@3675,5525.07
F1_4: D69.2 F1.4 | length 137.8
  Bottom Layer w10: D69.2@6843.83,4902.18 cw(c6843.83,4883.43) 6862.57,4883.43 F1.4@6862.57,4775.05
F1_6: F1.6 G1.2 | length 1168.4
  Bottom Layer w10: F1.6@6447.57,5040.05 ccw(c6515.93,5040.05) 6515.93,4971.69 6657.94,4971.69 ccw(c6657.94,5076.69) 6762.94,5076.69 cw(c6857.94,5076.69) 6857.94,5171.69 7365.95,5171.69 cw(c7365.95,5110.05) G1.2@7427.59,5110.05
G1_4: D70.2 G1.4 | length 137.8
  Bottom Layer w10: D70.2@7593.84,4902.18 cw(c7593.84,4883.43) 7612.59,4883.43 G1.4@7612.59,4775.05
G1_6: G1.6 H1.2 | length 1168.4
  Bottom Layer w10: G1.6@7197.59,5040.05 ccw(c7265.95,5040.05) 7265.95,4971.69 7407.95,4971.69 ccw(c7407.95,5076.69) 7512.95,5076.69 cw(c7607.95,5076.69) 7607.95,5171.69 8115.96,5171.69 cw(c8115.96,5110.05) H1.2@8177.6,5110.05
GND: A1.5 B1.5 BACKSPACE1.5 C9.5 CAPS1.5 D67.5 DEL1.5 DOWN1.5 E1.5 ENTER1.5 ESC1.5 F1.5 G1.5 H1.5 I1.5 J2.5 J3.1 K1.5 L1.5 LALT1.5 LCTRL1.5 LEFT1.5 LGUI1.5 LSHIFT1.5 M1.5 N1.5 O1.5 P1.5 Q1.5 R6.5 RIGHT1.5 RSHIFT1.5 S1.5 SPACE1.5 T1.5 TAB1.5 TO1.5 U2.5 U5.6 U6.5 UP1.5 V1.5 W1.5 X2.5 Y1.5 Z1.5
  other v1: 11975.53,3026.71 8520.53,3136.71 8596.82,3136.71 8685.53,3136.71 9340.53,3136.71 9405.53,3136.71 9470.53,3136.71 9750.14,3136.99 10207.69,3136.99 11005.53,3136.71 7230.53,3186.71 7297.56,3186.71 7360.53,3186.71 6715.53,3516.71 11730.09,3896.71 11765.53,3896.71 11800.53,3896.71 6615.53,4136.71 7320.53,4136.71 6725.53,4286.71 5812.54,4330.41 7320.53,4356.71 6822.58,4360.04 11415.53,4361.71 6525.53,4366.71 7345.53,4626.71
H1_4: D71.2 H1.4 | length 137.8
  Bottom Layer w10: D71.2@8343.86,4902.18 cw(c8343.86,4883.43) 8362.6,4883.43 H1.4@8362.6,4775.05
H1_6: H1.6 J2.2 | length 1168.4
  Bottom Layer w10: H1.6@7947.6,5040.05 ccw(c8015.96,5040.05) 8015.96,4971.69 8157.97,4971.69 ccw(c8157.97,5076.69) 8262.97,5076.69 cw(c8357.97,5076.69) 8357.97,5171.69 8865.98,5171.69 cw(c8865.98,5110.05) J2.2@8927.62,5110.05
I1_2: I1.2 U2.6 | length 1168.4
  Bottom Layer w10: U2.6@8510.11,5790.07 ccw(c8578.48,5790.07) 8578.48,5721.71 8720.48,5721.71 ccw(c8720.48,5826.71) 8825.48,5826.71 cw(c8920.48,5826.71) 8920.48,5921.71 9428.49,5921.71 cw(c9428.49,5860.07) I1.2@9490.13,5860.07
J2_4: D72.2 J2.4 | length 137.8
  Bottom Layer w10: D72.2@9093.88,4902.18 cw(c9093.88,4883.43) 9112.62,4883.43 J2.4@9112.62,4775.05
J2_6: J2.6 K1.2 | length 1168.4
  Bottom Layer w10: J2.6@8697.62,5040.05 ccw(c8765.98,5040.05) 8765.98,4971.69 8907.99,4971.69 ccw(c8907.99,5076.69) 9012.99,5076.69 cw(c9107.99,5076.69) 9107.99,5171.69 9616,5171.69 cw(c9616,5110.05) K1.2@9677.63,5110.05
K1_4: D73.2 K1.4 | length 137.8
  Bottom Layer w10: D73.2@9843.89,4902.18 cw(c9843.89,4883.43) 9862.63,4883.43 K1.4@9862.63,4775.05
K1_6: K1.6 L1.2 | length 1168.4
  Bottom Layer w10: K1.6@9447.63,5040.05 ccw(c9516,5040.05) 9516,4971.69 9658,4971.69 ccw(c9658,5076.69) 9763,5076.69 cw(c9858,5076.69) 9858,5171.69 10366.01,5171.69 cw(c10366.01,5110.05) L1.2@10427.65,5110.05
L1_4: D74.2 L1.4 | length 137.8
  Bottom Layer w10: D74.2@10593.91,4902.18 cw(c10593.91,4883.43) 10612.65,4883.43 L1.4@10612.65,4775.05
L1_6: ENTER1.2 L1.6 | length 1449.6
  Bottom Layer w10: L1.6@10197.65,5040.05 ccw(c10266.01,5040.05) 10266.01,4971.69 10408.02,4971.69 ccw(c10408.02,5076.69) 10513.02,5076.69 cw(c10608.02,5076.69) 10608.02,5171.69 11397.28,5171.69 cw(c11397.28,5110.05) ENTER1.2@11458.92,5110.05
LALT1_4: D41.2 LALT1.4 | length 137.8
  Bottom Layer w10: D41.2@5343.8,3402.14 cw(c5343.8,3383.4) 5362.54,3383.4 LALT1.4@5362.54,3275.02
LALT1_6: LALT1.6 SPACE1.2 | length 1637.1
  Bottom Layer w10: LALT1.6@4947.54,3540.02 ccw(c5015.9,3540.02) 5015.9,3471.66 5157.9,3471.66 ccw(c5157.9,3576.66) 5262.9,3576.66 cw(c5357.9,3576.66) 5357.9,3671.66 6334.68,3671.66 cw(c6334.68,3610.02) SPACE1.2@6396.31,3610.02
LCTRL1_2: J3.2 LCTRL1.2 | length 799.6
  Bottom Layer w10: J3.2@3093.74,3375.03 3185.29,3375.02 ccw(c3185.29,3420.27) 3230.53,3420.27 3230.53,3623.29 cw(c3283.95,3623.29) 3283.95,3676.71 3545.53,3676.71 cw(c3545.53,3638.48) 3583.75,3638.48 LCTRL1.2@3583.75,3610.02
LCTRL1_6: LCTRL1.6 LGUI1.2 | length 1262.1
  Bottom Layer w10: LCTRL1.6@3353.75,3540.02 ccw(c3422.12,3540.02) 3422.12,3471.66 3564.12,3471.66 ccw(c3564.12,3576.66) 3669.12,3576.66 cw(c3764.12,3576.66) 3764.12,3671.66 4365.88,3671.66 cw(c4365.88,3610.02) LGUI1.2@4427.52,3610.02
LEFT1_4: D50.2 LEFT1.4 | length 137.8
  Bottom Layer w10: D50.2@10406.4,3402.14 cw(c10406.4,3383.4) 10425.15,3383.4 LEFT1.4@10425.15,3275.02
LEFT1_6: DOWN1.2 LEFT1.6 | length 1168.4
  Bottom Layer w10: LEFT1.6@10010.15,3540.02 ccw(c10078.51,3540.02) 10078.51,3471.66 10220.51,3471.66 ccw(c10220.51,3576.66) 10325.51,3576.66 cw(c10420.51,3576.66) 10420.51,3671.66 10928.52,3671.66 cw(c10928.52,3610.02) DOWN1.2@10990.16,3610.02
LGUI1_4: D35.2 LGUI1.4 | length 137.8
  Bottom Layer w10: D35.2@4593.78,3402.14 cw(c4593.78,3383.4) 4612.52,3383.4 LGUI1.4@4612.52,3275.02
LGUI1_6: LALT1.2 LGUI1.6 | length 1168.4
  Bottom Layer w10: LGUI1.6@4197.52,3540.02 ccw(c4265.88,3540.02) 4265.88,3471.66 4407.89,3471.66 ccw(c4407.89,3576.66) 4512.89,3576.66 cw(c4607.89,3576.66) 4607.89,3671.66 5115.9,3671.66 cw(c5115.9,3610.02) LALT1.2@5177.54,3610.02
LSHIFT1_6: LSHIFT1.6 Z1.2 | length 1449.6
  Bottom Layer w10: LSHIFT1.6@3541.26,4290.04 ccw(c3609.62,4290.04) 3609.62,4221.68 3751.62,4221.68 ccw(c3751.62,4326.68) 3856.62,4326.68 cw(c3951.62,4326.68) 3951.62,4421.68 4740.89,4421.68 cw(c4740.89,4360.04) Z1.2@4802.53,4360.04
M1_4: D60.2 M1.4 | length 137.8
  Bottom Layer w10: D60.2@9468.88,4152.16 cw(c9468.88,4133.42) 9487.63,4133.42 M1.4@9487.63,4025.04
M1_6: M1.6 TO1.2 | length 1168.4
  Bottom Layer w10: M1.6@9072.63,4290.04 ccw(c9140.99,4290.04) 9140.99,4221.68 9282.99,4221.68 ccw(c9282.99,4326.68) 9387.99,4326.68 cw(c9482.99,4326.68) 9482.99,4421.68 9991,4421.68 cw(c9991,4360.04) TO1.2@10052.64,4360.04
N1_4: D59.2 N1.4 | length 137.8
  Bottom Layer w10: D59.2@8718.87,4152.16 cw(c8718.87,4133.42) 8737.61,4133.42 N1.4@8737.61,4025.04
N1_6: M1.2 N1.6 | length 1168.4
  Bottom Layer w10: N1.6@8322.61,4290.04 ccw(c8390.97,4290.04) 8390.97,4221.68 8532.98,4221.68 ccw(c8532.98,4326.68) 8637.98,4326.68 cw(c8732.98,4326.68) 8732.98,4421.68 9240.99,4421.68 cw(c9240.99,4360.04) M1.2@9302.63,4360.04
O1_2: I1.6 O1.2 | length 1168.4
  Bottom Layer w10: I1.6@9260.13,5790.07 ccw(c9328.49,5790.07) 9328.49,5721.71 9470.5,5721.71 ccw(c9470.5,5826.71) 9575.5,5826.71 cw(c9670.5,5826.71) 9670.5,5921.71 10178.51,5921.71 cw(c10178.51,5860.07) O1.2@10240.15,5860.07
P1_2: O1.6 P1.2 | length 1168.4
  Bottom Layer w10: O1.6@10010.15,5790.07 ccw(c10078.51,5790.07) 10078.51,5721.71 10220.51,5721.71 ccw(c10220.51,5826.71) 10325.51,5826.71 cw(c10420.51,5826.71) 10420.51,5921.71 10928.52,5921.71 cw(c10928.52,5860.07) P1.2@10990.16,5860.07
Q1_2: ESC1.6 Q1.2 | length 1168.4
  Bottom Layer w10: ESC1.6@3260,5790.07 ccw(c3328.36,5790.07) 3328.36,5721.71 3470.37,5721.71 ccw(c3470.37,5826.71) 3575.37,5826.71 cw(c3670.37,5826.71) 3670.37,5921.71 4178.38,5921.71 cw(c4178.38,5860.07) Q1.2@4240.02,5860.07
R6_2: E1.6 R6.2 | length 1168.4
  Bottom Layer w10: E1.6@5510.05,5790.07 ccw(c5578.41,5790.07) 5578.41,5721.71 5720.42,5721.71 ccw(c5720.42,5826.71) 5825.42,5826.71 cw(c5920.42,5826.71) 5920.42,5921.71 6428.43,5921.71 cw(c6428.43,5860.07) R6.2@6490.07,5860.07
R7_2: LED1.2 R7.2 | length 124.3
  Top Layer w10: v1(11906.43,4876.71) LED1.2@11906.43,4935.3
  Bottom Layer w10: R7.2@11906.43,4810.95 v1(11906.43,4876.71)